# EAGLE board segmentring4und8groß (EAGLE 7.2.0)
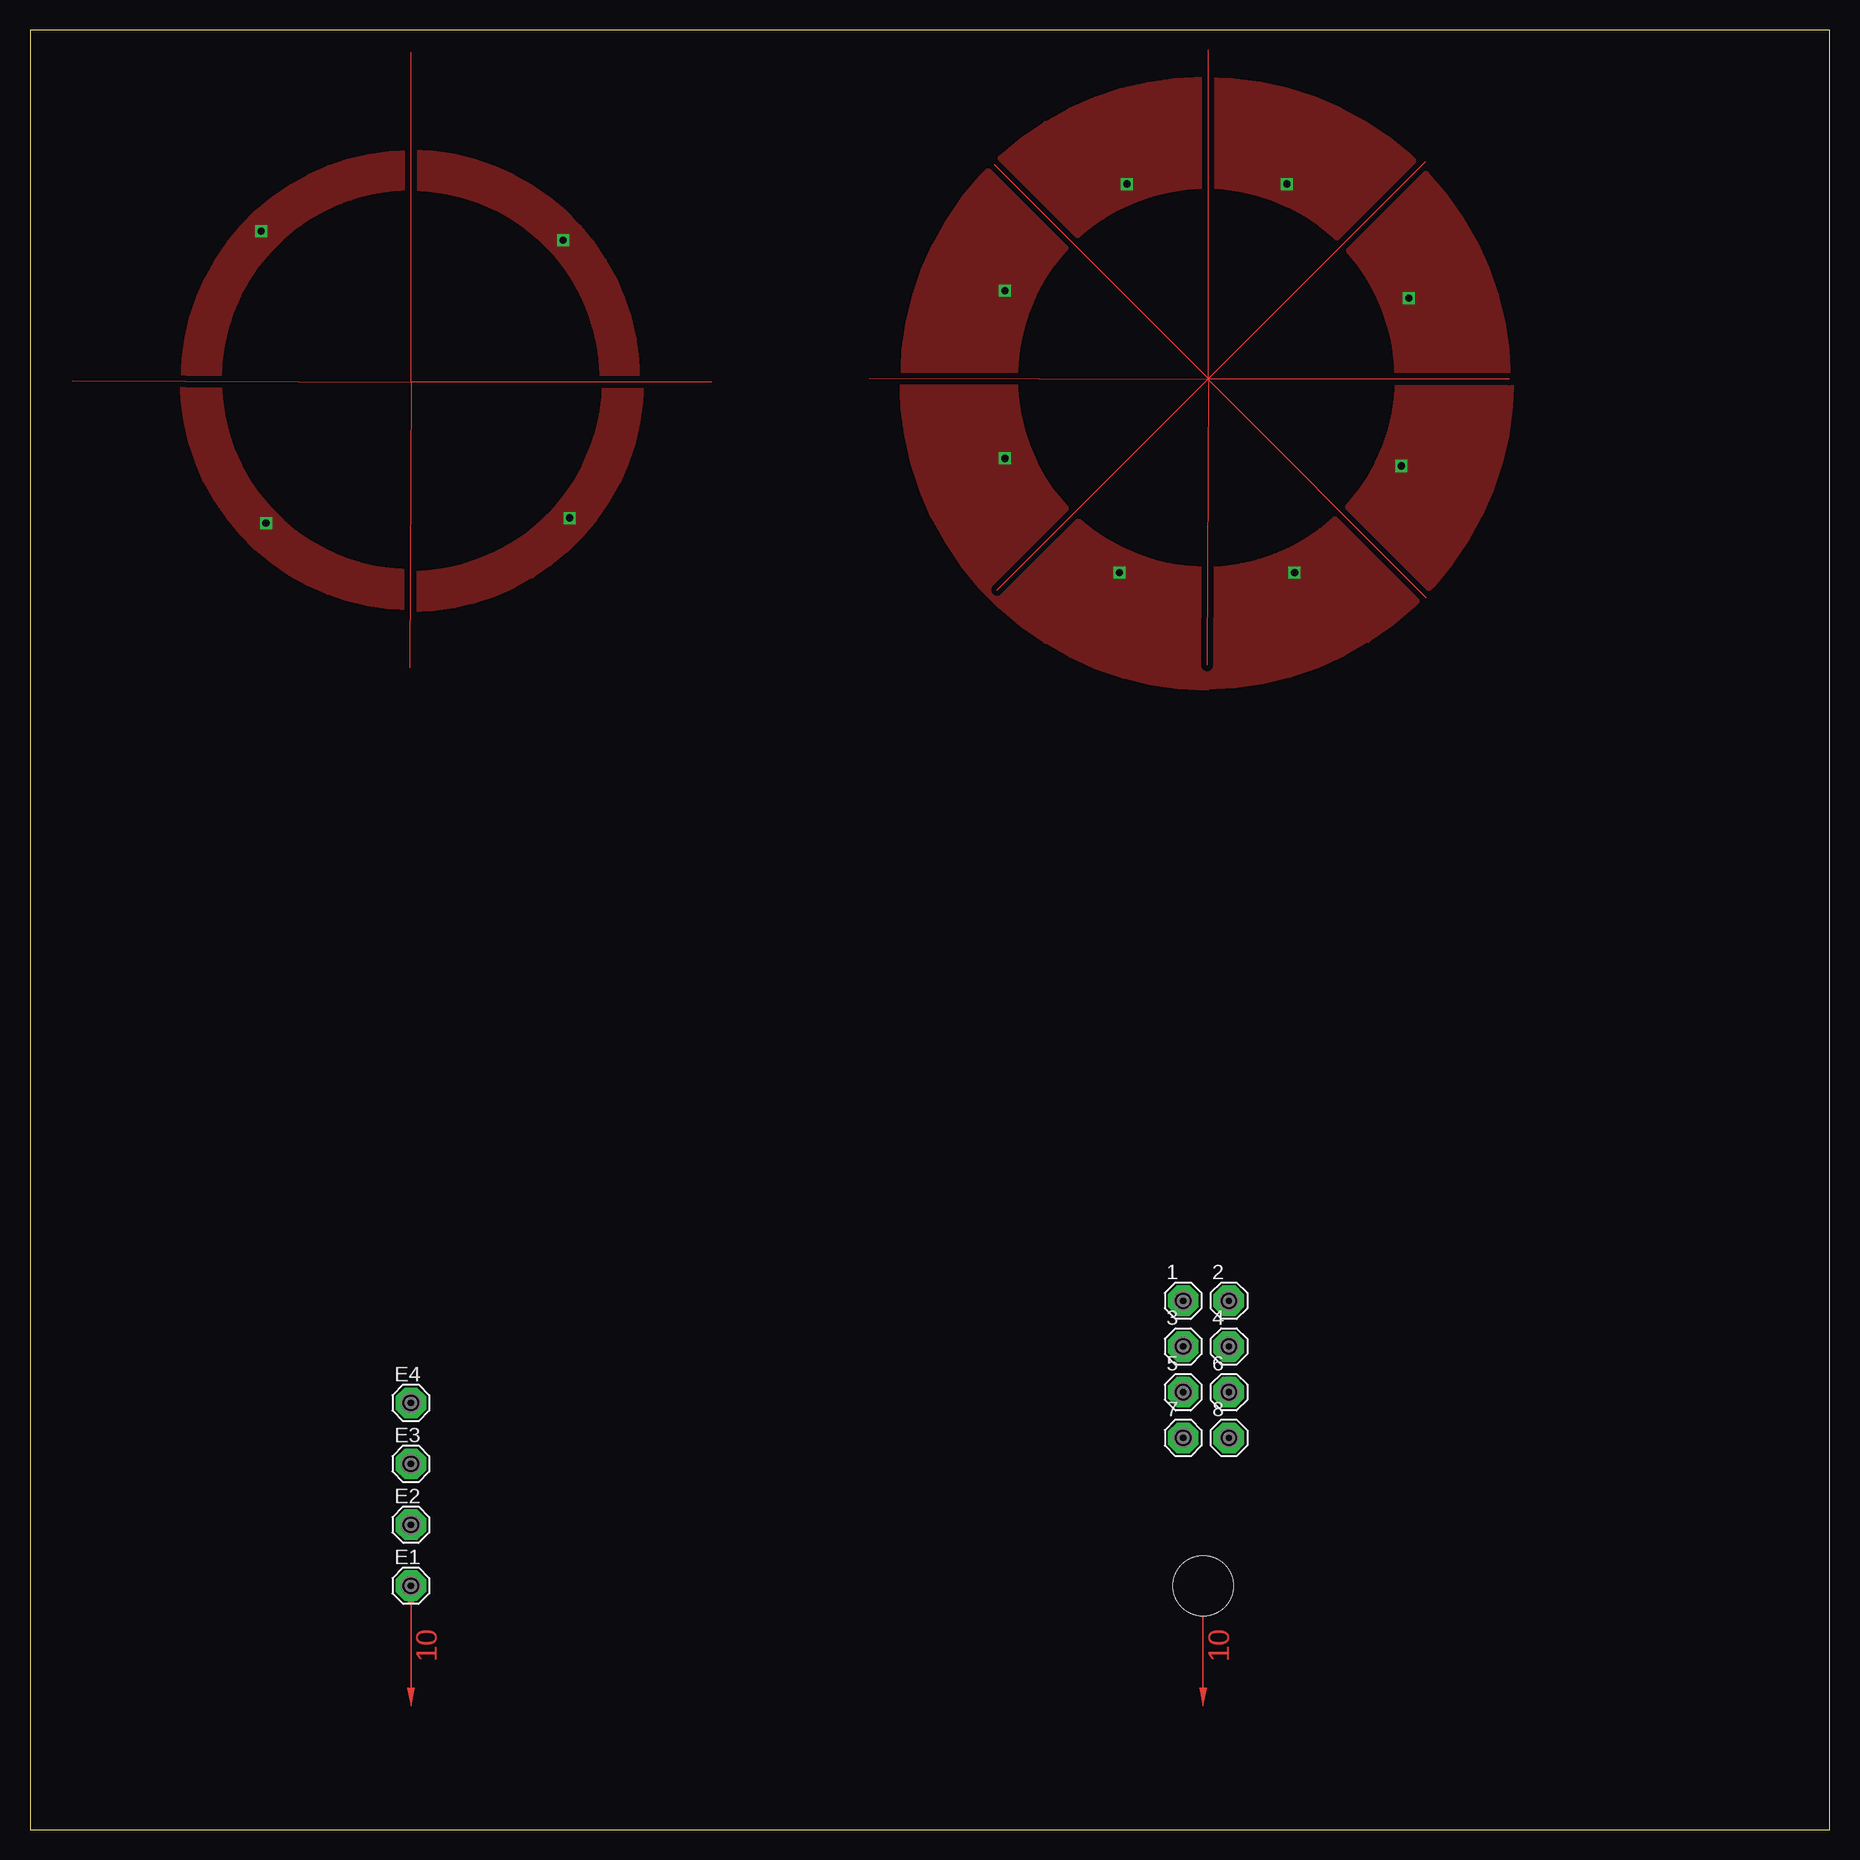
[diagram p0: board, top side]
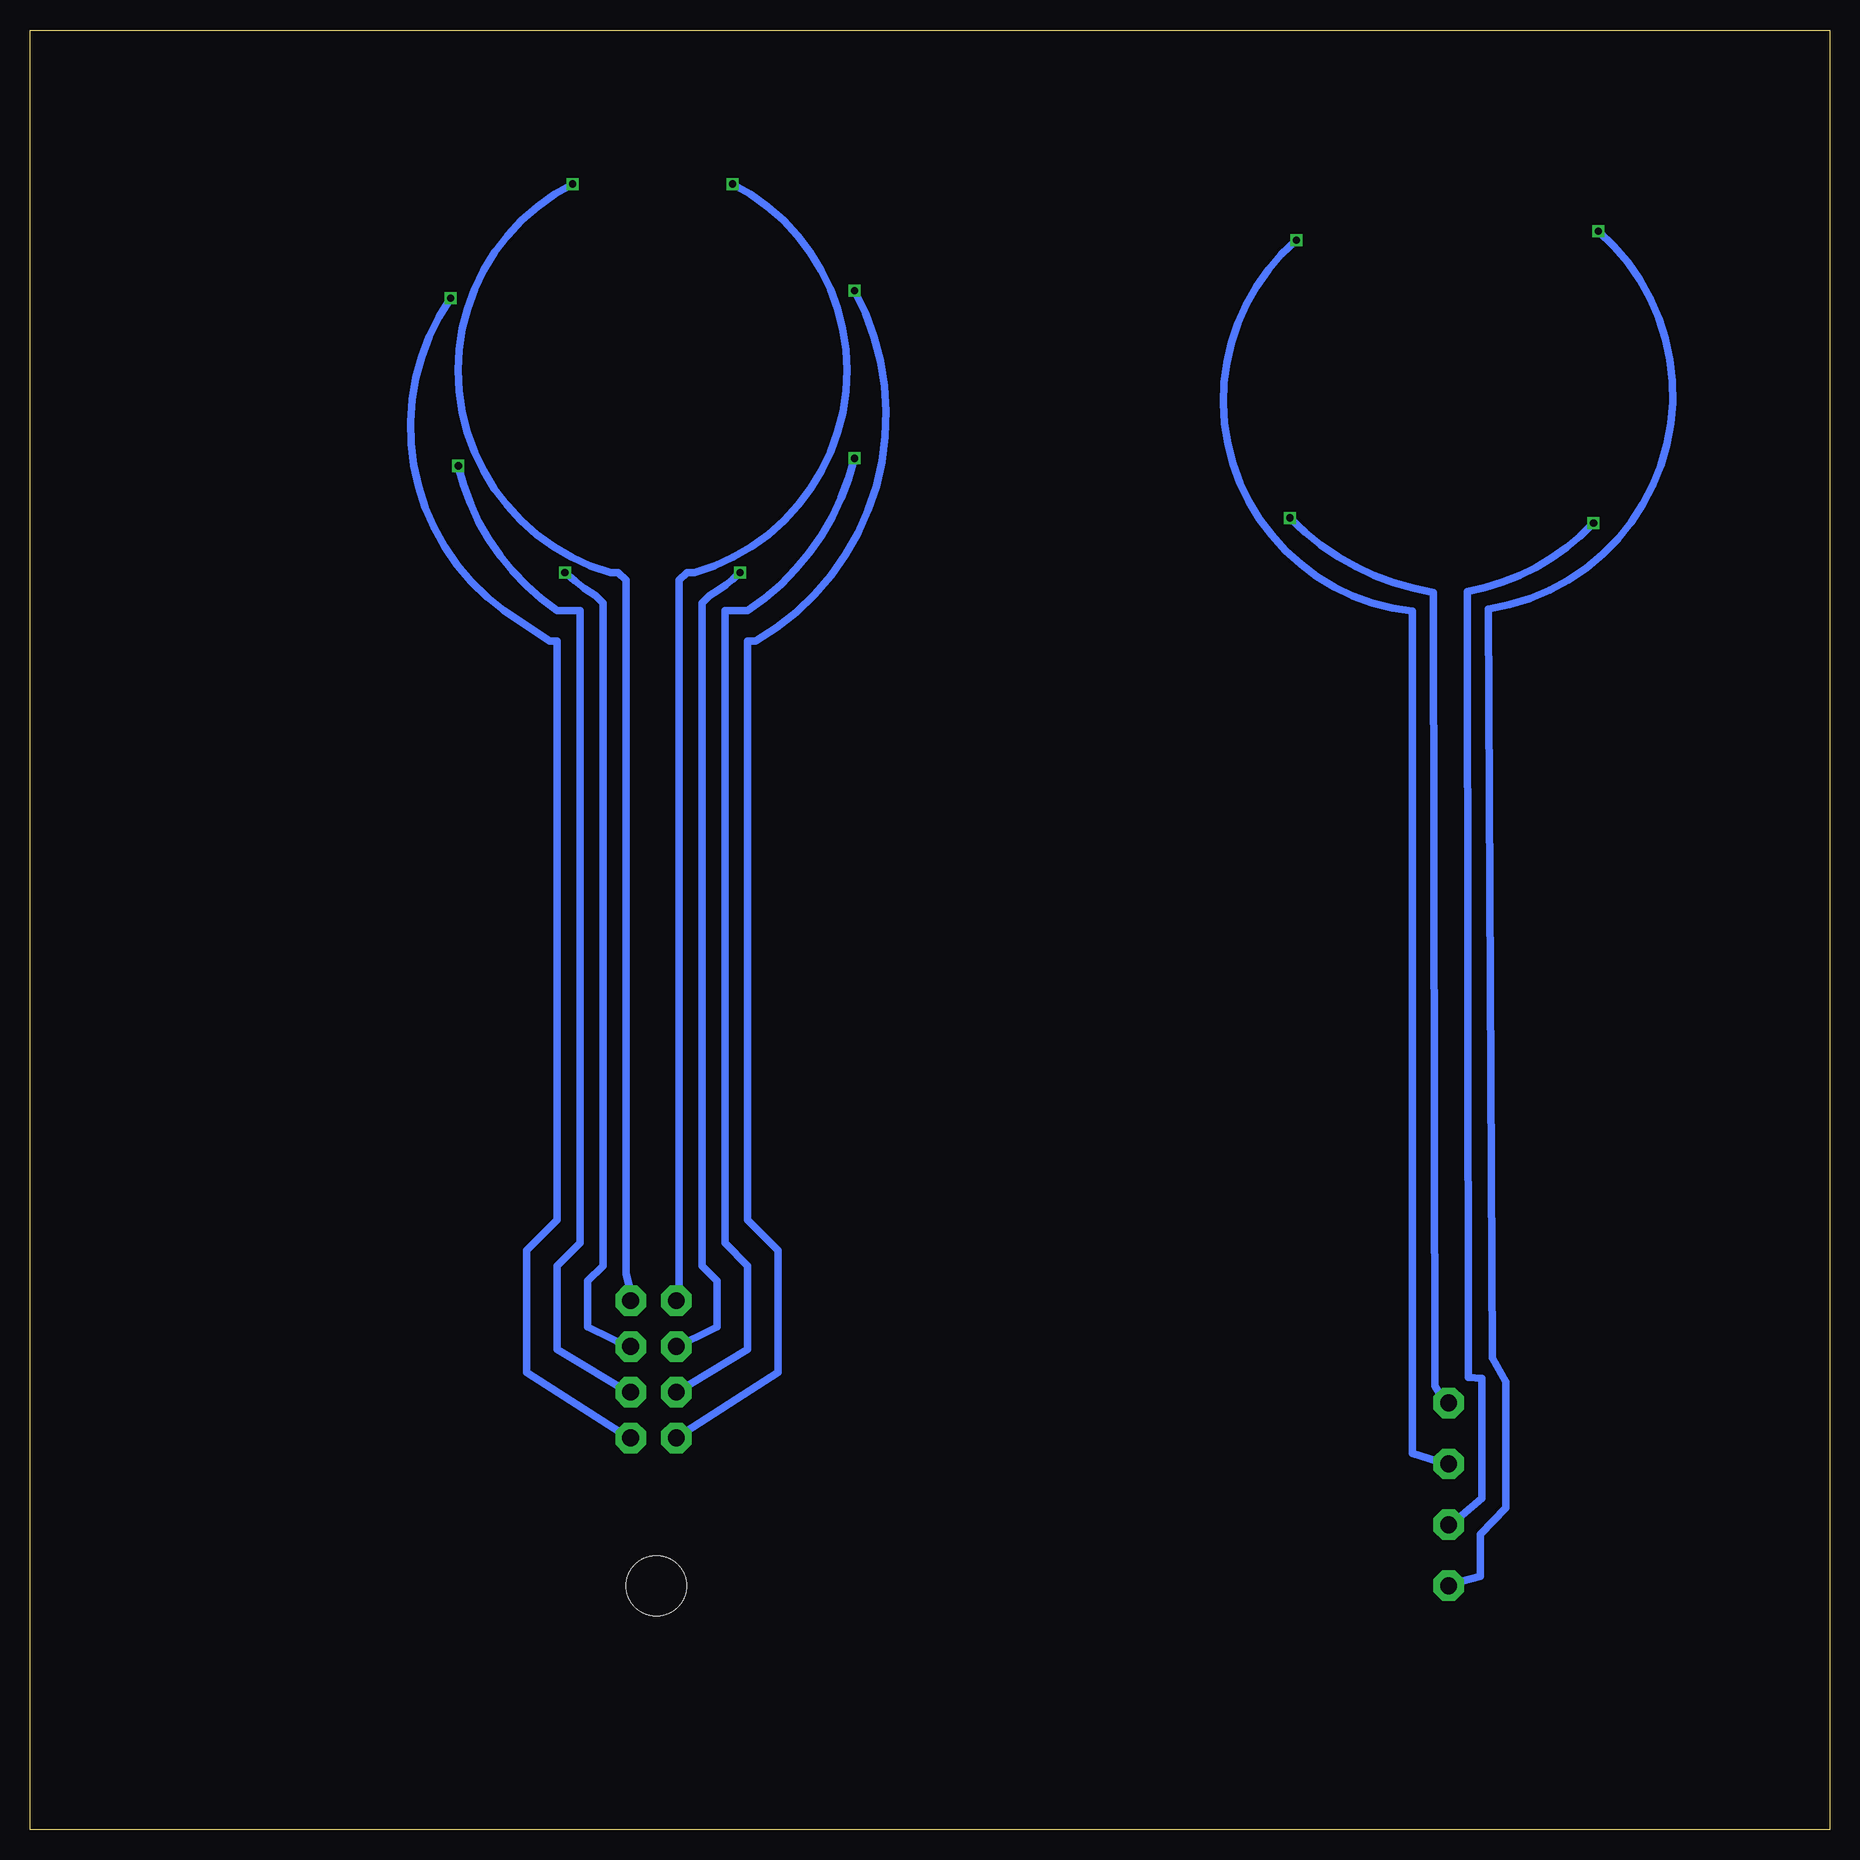
[diagram p1: board, bottom side, seen from below]

Size 150 x 150 mm. Coordinates in mm from the lower left corner, seen from the top.
Outline: 0,0 150,0 150,150 0,150 0,0
Copper layers (1*16): Top 0.035mm / dielectric 1.5mm / Bottom 0.035mm
Design rules "default": minimum track width 10mil, minimum drill 24mil, track to track 8mil, track to pad 8mil, pad to pad 8mil, via to via 8mil, smd to smd 8mil, copper to edge 40mil, drill to drill 8mil, minimum pad ring 10mil, minimum via ring 8mil, stop-mask expansion 4mil, vias tented up to drill 0mil, thermal gap 10mil
Holes 5 mm at 97.79,20.32

## Footprints (pad centres in the part's own frame; a part is rotated, then mirrored left to right if it is on the bottom)
SE14 = drill 1.397 pad 2.54 octagon: MP 0,0

## Placement (x,y rotation side)
1  SE14  [SE14]  96.12,44.08 0 top
2  SE14  [SE14]  99.94,44.08 0 top
3  SE14  [SE14]  96.12,40.27 0 top
4  SE14  [SE14]  99.94,40.27 0 top
5  SE14  [SE14]  96.12,36.45 0 top
6  SE14  [SE14]  99.94,36.45 0 top
7  SE14  [SE14]  96.12,32.65 0 top
8  SE14  [SE14]  99.94,32.65 0 top
E1  SE14  [SE14]  31.75,20.32 0 top
E2  SE14  [SE14]  31.75,25.4 0 top
E3  SE14  [SE14]  31.75,30.48 0 top
E4  SE14  [SE14]  31.75,35.56 0 top

## Library data of the parts
1-8 E1-E4 = solpad

## Nets
N$4: E1.MP
N$5: E2.MP
N$6: E3.MP
N$7: E4.MP

## Tracks (layer width: path | path; a pad name or v marks a point on that pad's centre or on a via)
1  (via drill 0.6)
  Bottom 0.61: v91.44,137.16 arc137 94.61,104.78 95.25,104.78 95.89,104.14 95.89,43.81
  pour Top (isolate 0.5): 97.81,136.92 arc90 82.05,120.79 72.77,120.94 arc-90 97.81,145.92
2  (via drill 0.6)
  Bottom 0.61: v104.78,137.16 arc-137 101.6,104.78 100.97,104.78 100.33,104.14 100.33,46.35 99.69,43.81
  pour Top (isolate 0.5): 97.88,136.99 arc-90 114.02,121.08 123.44,120.99 arc90 97.88,145.85
3  (via drill 0.6)
  Bottom 0.61: v90.81,104.78 arc13 93.34,102.87 93.98,102.23 93.98,46.99 92.71,45.72 92.71,41.91 96.52,40.01
  pour Top (isolate 0.5): 82.12,120.86 arc90 97.95,105.09 98.11,95.11 arc-90 72.69,120.93
4  (via drill 0.6)
  Bottom 0.61: v105.41,104.78 arc-11 102.87,102.87 102.23,102.23 102.23,46.99 103.5,45.72 103.5,41.91 99.69,40.01
  pour Top (isolate 0.5): 98.03,105.1 arc90 113.94,120.94 123.51,121.08 arc-90 98.03,95.17
5  (via drill 0.6)
  Bottom 0.61: v81.28,114.3 arc43 90.17,101.6 92.08,101.6 92.08,48.9 90.17,46.99 90.17,40.01 96.52,36.2
  pour Top (isolate 0.5): 82.12,120.94 arc90 97.96,105.1 98.1,95.11 arc-90 72.69,120.94
6  (via drill 0.6)
  Bottom 0.61: v114.3,113.67 arc-43 106.05,101.6 104.14,101.6 104.14,48.9 106.05,46.99 106.05,40.01 99.69,36.2
  pour Top (isolate 0.5): 98.11,105.16 arc90 114.02,120.93 123.51,121 arc-90 97.95,95.25
7  (via drill 0.6)
  Bottom 0.61: v81.28,128.27 arc89 89.53,99.06 90.17,99.06 90.17,50.8 87.63,48.26 87.63,38.1 96.52,32.38
  pour Top (isolate 0.5): 97.89,136.99 arc90 82.12,120.79 72.76,120.86 arc-90 97.81,145.93
8  (via drill 0.6)
  Bottom 0.61: v114.94,127.64 arc-89 110.49,101.6 106.68,99.06 106.05,99.06 106.05,50.8 108.58,48.26 108.58,38.1 99.69,32.38
  pour Top (isolate 0.5): 97.96,136.92 arc-90 113.94,120.94 123.29,121.01 arc90 97.74,145.93
E1  (via drill 0.6)
  Bottom 0.61: v19.27,133.23 arc130 28.44,101.75 28.1,39.3 27,37.3 27,26.8 29.1,24.6 29.1,21.1 31.5,20.5
  pour Top (isolate 0.5): 31.67,136.81 arc90 15.76,120.82 12.76,120.82 arc-90 31.75,139.81
E2  (via drill 0.6)
  Bottom 0.61: v19.67,108.89 arc36 30.2,103.19 30.1,37.7 29,37.6 29,27.6 31.5,25.5
  pour Top (isolate 0.5): 15.76,120.74 arc90 31.75,104.91 31.67,101.83 arc-90 12.69,120.89
E3  (via drill 0.6)
  Bottom 0.61: v44.44,132.48 arc-133 34.77,101.55 34.77,31.36 32,30.5
  pour Top (isolate 0.5): 31.82,136.81 arc-90 47.66,120.89 50.67,120.82 arc90 31.82,139.8
E4  (via drill 0.6)
  Bottom 0.61: v44.97,109.33 arc-37 33.01,103.12 32.9,37 32,35.5
  pour Top (isolate 0.5): 31.84,104.75 arc90 47.91,120.82 51,120.82 arc-90 31.75,101.66
N$1
  Top 0: 3.52,120.76 31.75,120.65 | 56.84,120.65 31.75,120.65 | 31.75,120.65 31.75,148.14 | 31.75,120.65 31.65,96.83
N$2
  Top 0: 69.98,120.99 98.21,120.88 | 123.3,120.88 98.21,120.88 | 98.21,120.88 98.21,148.37 | 98.21,120.88 98.11,97.06
S$2
  Top 0: 98.28,120.9 80.41,138.77
S$3
  Top 0: 98.17,120.89 116.37,102.69
S$4
  Top 0: 80.61,103.32 116.35,139.06
(copper drawn outside any net)
  shapes: Top area x2